# EAGLE board stm32 (EAGLE 8.6.0)
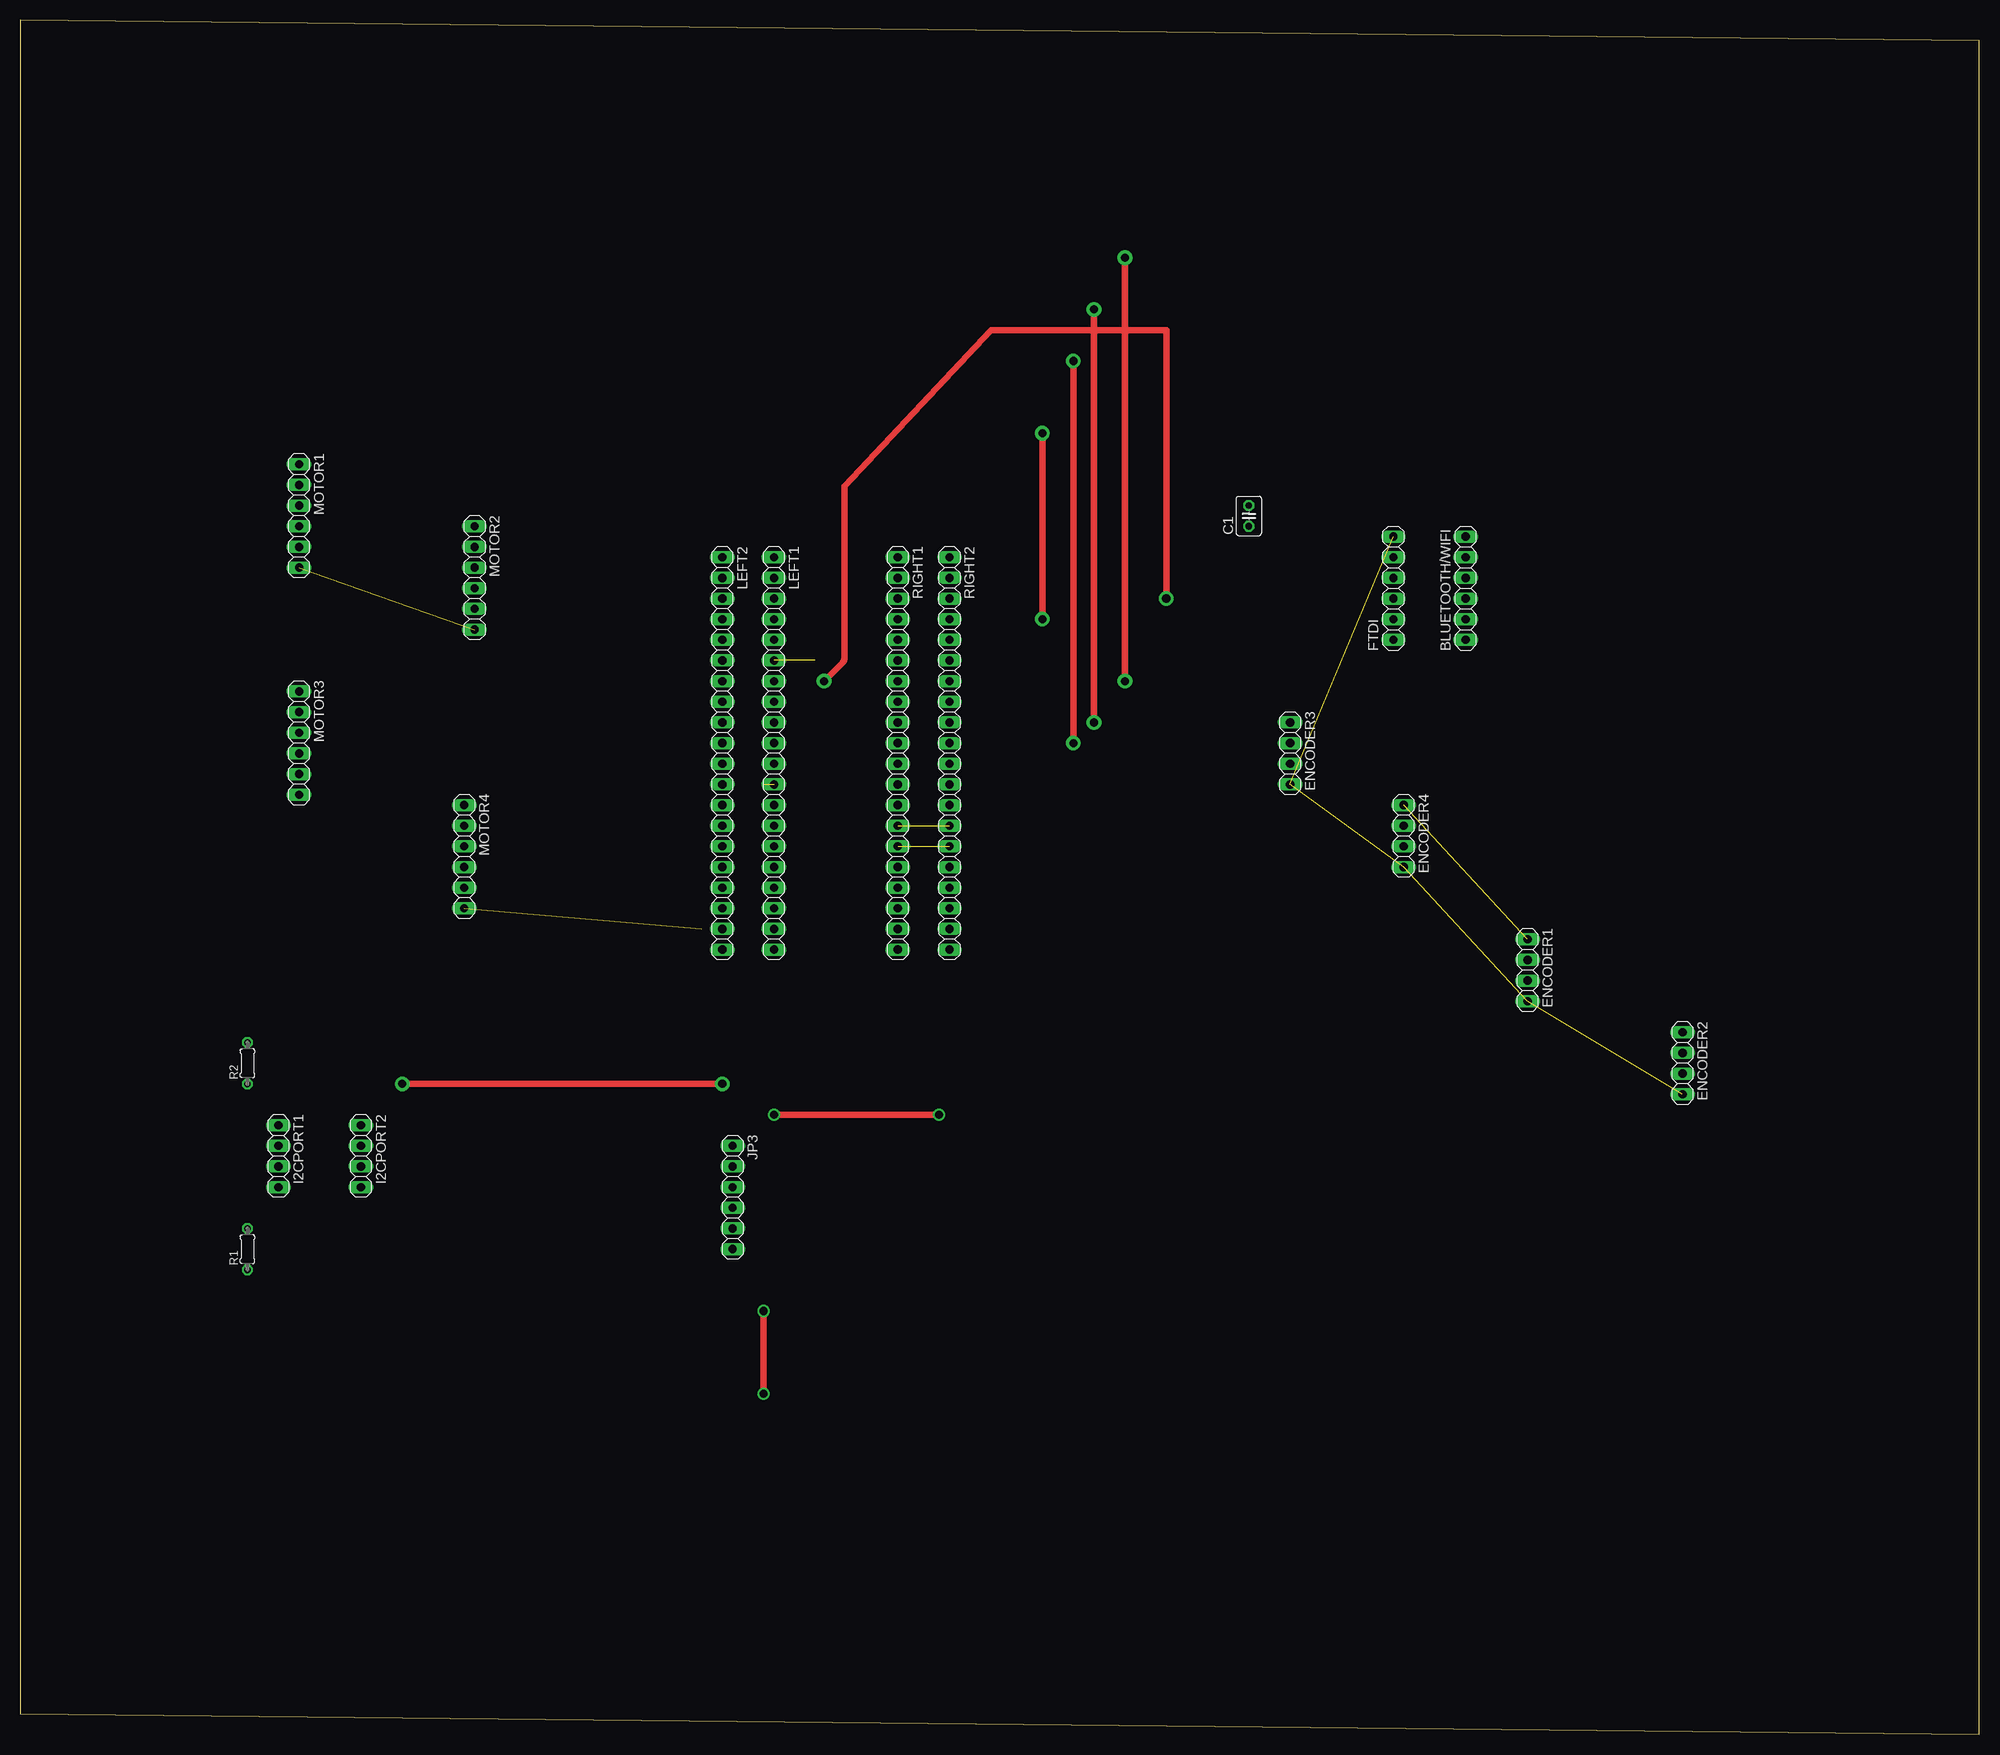
[diagram p0: board, top side]
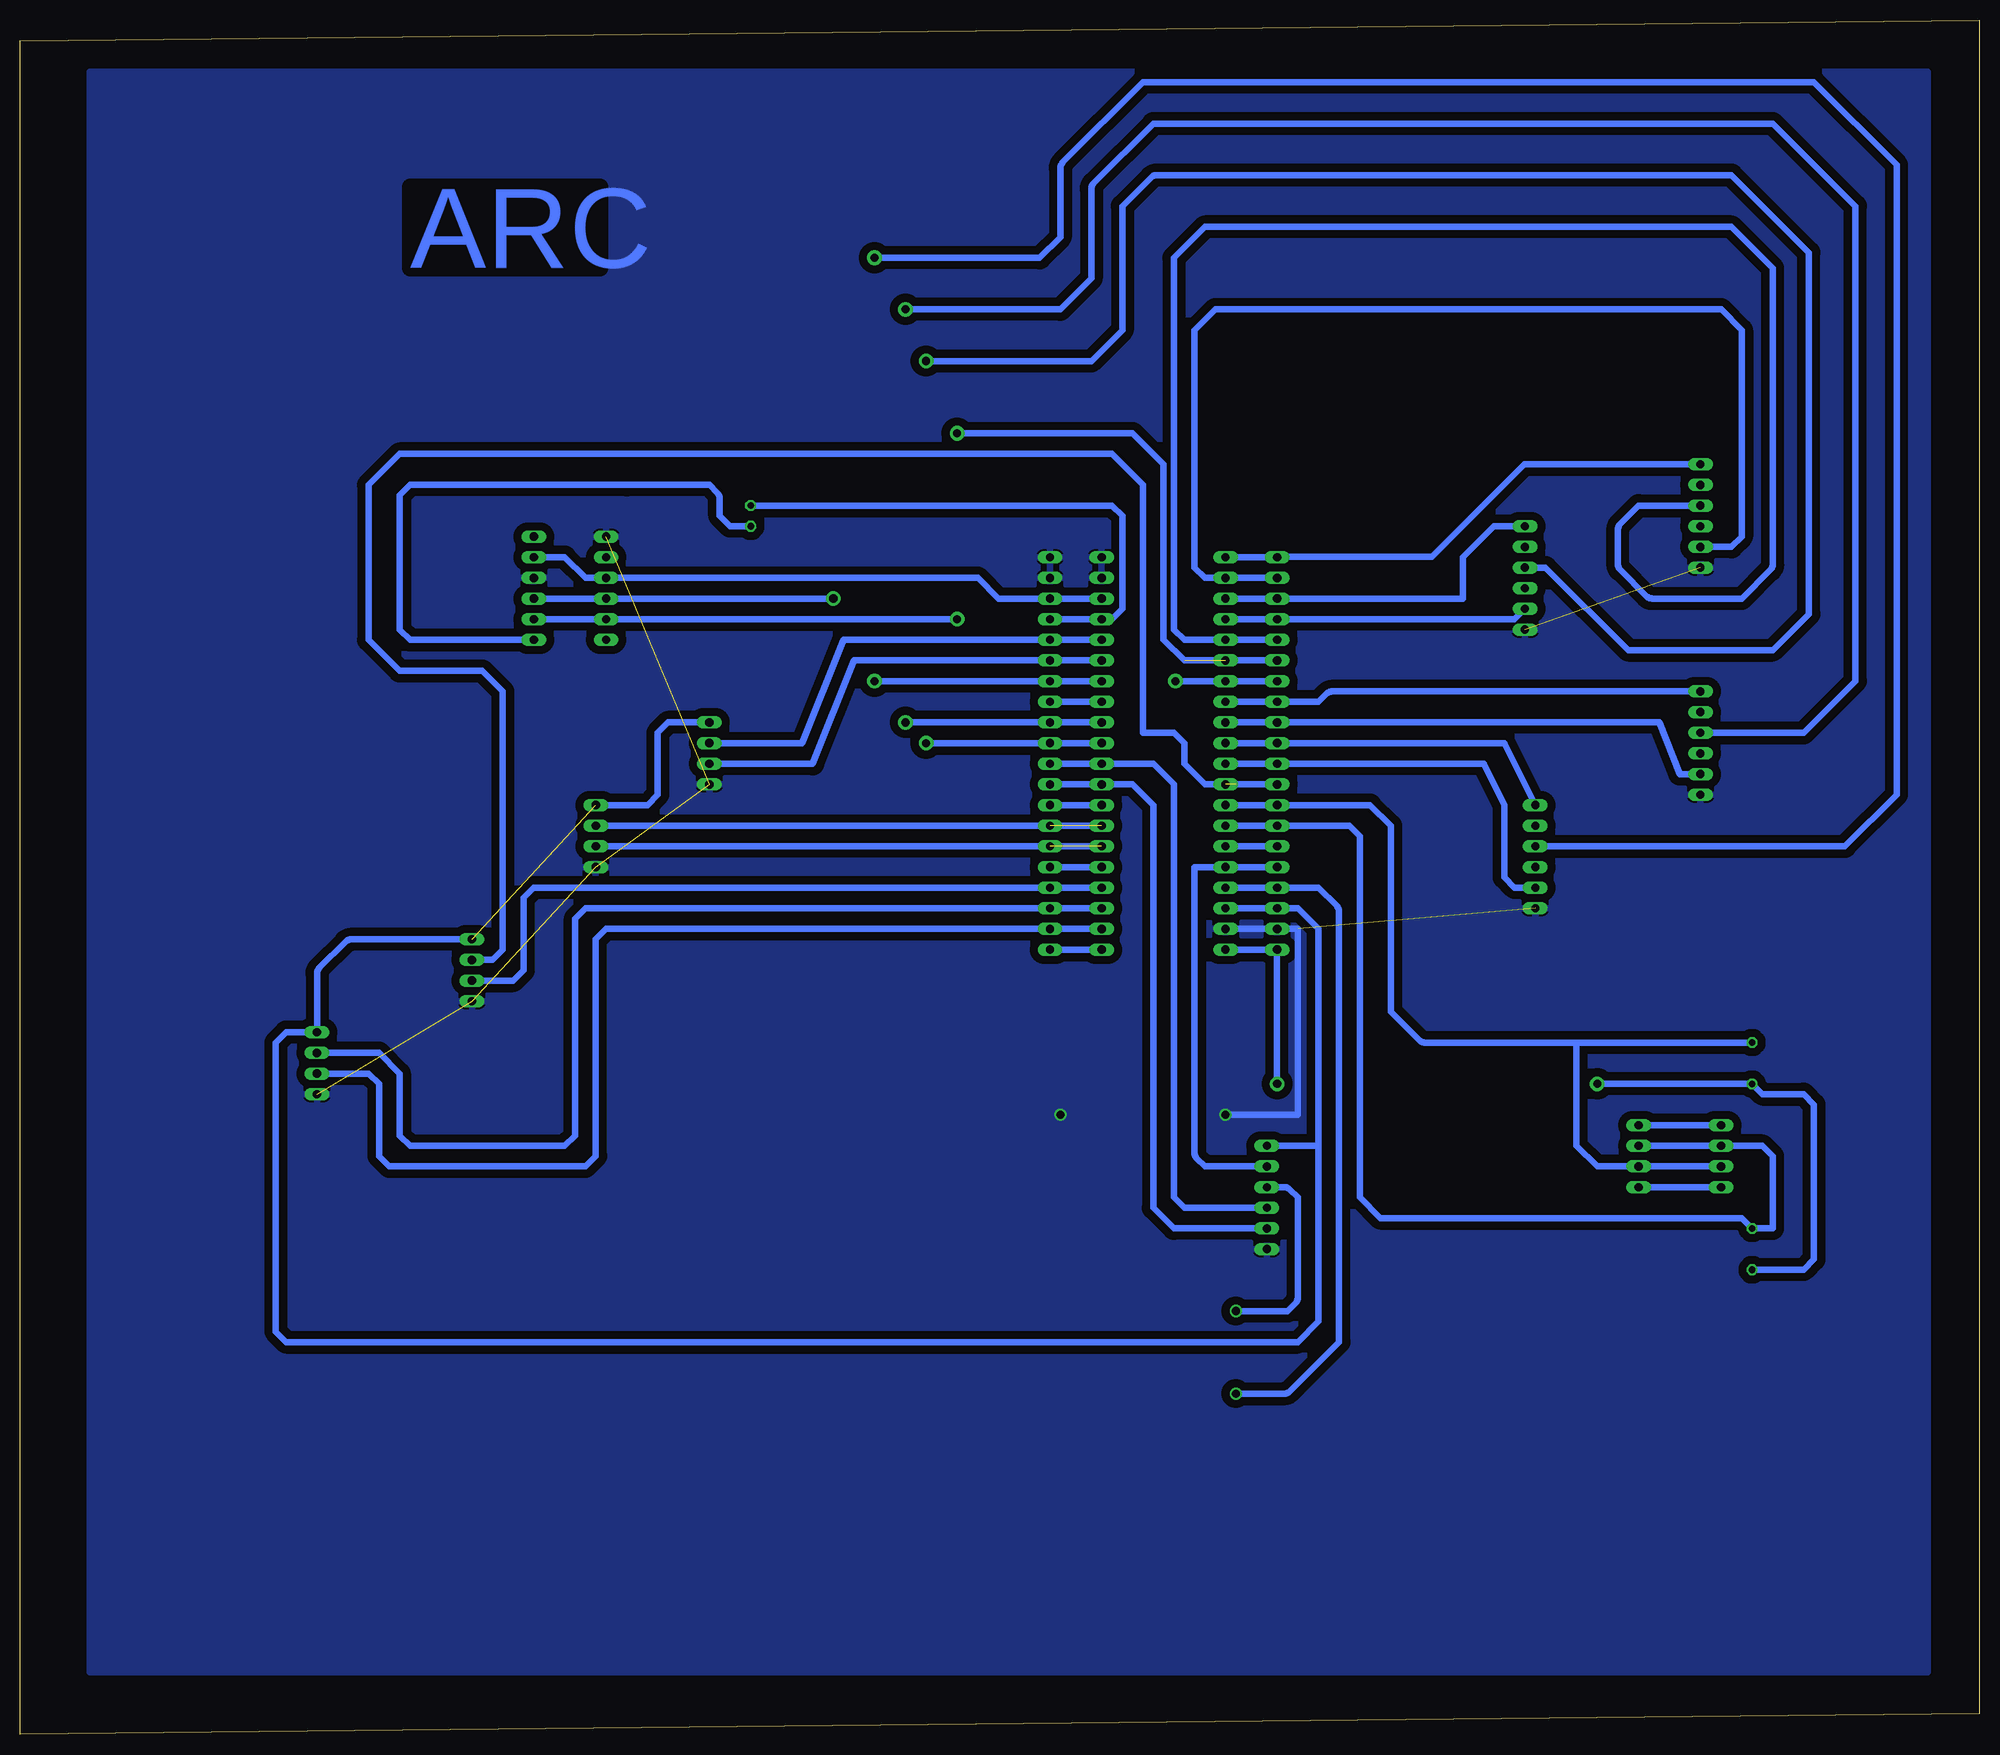
[diagram p1: board, bottom side, seen from below]

Size 240.97 x 210.81 mm. Coordinates in mm from the lower left corner, seen from the top.
Outline: 0,2.54 240.97,0 240.97,208.27 0,210.81 0,2.54
Copper layers (1*16): Top 0.035mm / dielectric 1.5mm / Bottom 0.035mm
Design rules "default": minimum track width 6mil, minimum drill 0.35mm, track to track 6mil, track to pad 6mil, pad to pad 6mil, via to via 6mil, smd to smd 6mil, copper to edge 40mil, drill to drill 6mil, minimum pad ring 10mil, minimum via ring 8mil, stop-mask expansion 4mil, vias tented up to drill 0mil, thermal gap 10mil

## Footprints (pad centres in the part's own frame; a part is rotated, then mirrored left to right if it is on the bottom)
1X06 = drill 1.016 long: 1 -6.35,0; 2 -3.81,0; 3 -1.27,0; 4 1.27,0; 5 3.81,0; 6 6.35,0
C025-030X050 = drill 0.813 octagon: 1 -1.27,0; 2 1.27,0
1X04 = drill 1.016 long: 1 -3.81,0; 2 -1.27,0; 3 1.27,0; 4 3.81,0
1X20 = drill 1.016 long: 1 -24.13,0; 2 -21.59,0; 3 -19.05,0; 4 -16.51,0; 5 -13.97,0; 6 -11.43,0; 7 -8.89,0; 8 -6.35,0; 9 -3.81,0; 10 -1.27,0; 11 1.27,0; 12 3.81,0; 13 6.35,0; 14 8.89,0; 15 11.43,0; 16 13.97,0; 17 16.51,0; 18 19.05,0; 19 21.59,0; 20 24.13,0
0204/5 = drill 0.813 octagon: 1 -2.54,0; 2 2.54,0

## Placement (x,y rotation side)
BLUETOOTH/WIFI  [1X06]  177.8,140.97 90 top
C1  [C025-030X050]  151.13,149.86 90 top
ENCODER1  [1X04]  185.42,93.98 270 top
ENCODER2  [1X04]  204.47,82.55 270 top
ENCODER3  [1X04]  156.21,120.65 270 top
ENCODER4  [1X04]  170.18,110.49 270 top
FTDI  [1X06]  168.91,140.97 90 top
I2CPORT1  [1X04]  31.75,71.12 270 top
I2CPORT2  [1X04]  41.91,71.12 270 top
JP3  [1X06]  87.63,66.04 270 top
LEFT1  [1X20]  92.71,120.65 270 top
LEFT2  [1X20]  86.36,120.65 270 top
MOTOR1  [1X06]  34.29,149.86 270 top
MOTOR2  [1X06]  55.88,142.24 270 top
MOTOR3  [1X06]  34.29,121.92 270 top
MOTOR4  [1X06]  54.61,107.95 270 top
R1  [0204/5]  27.94,59.69 90 top
R2  [0204/5]  27.94,82.55 90 top
RIGHT1  [1X20]  107.95,120.65 270 top
RIGHT2  [1X20]  114.3,120.65 270 top

## Library data of the parts
BLUETOOTH/WIFI ENCODER1-ENCODER4 FTDI I2CPORT1 I2CPORT2 JP3 LEFT1 LEFT2 MOTOR1-MOTOR4 RIGHT1 RIGHT2 = pinhead
C1 R1 R2 = resistor

## Nets
ENCODER4: C1.2 RIGHT1.4 RIGHT2.4
GND: BLUETOOTH/WIFI.4 ENCODER1.4 ENCODER2.4 ENCODER3.4 ENCODER4.4 FTDI.6 JP3.6 LEFT1.19 LEFT2.19 MOTOR1.6 MOTOR2.6 MOTOR3.6 MOTOR4.6 RIGHT1.1 RIGHT1.2 RIGHT2.1 RIGHT2.2
N$1: ENCODER1.1 ENCODER2.1 ENCODER3.1 ENCODER4.1 JP3.1 LEFT1.18 LEFT2.18
N$2: BLUETOOTH/WIFI.1 C1.1
N$3: LEFT1.20 LEFT2.20 R1.1 R2.1
N$4: LEFT1.1 LEFT2.1 MOTOR1.1
N$5: LEFT1.2 LEFT2.2 MOTOR1.5
N$6: LEFT1.3 LEFT2.3 MOTOR2.1
N$7: LEFT1.4 LEFT2.4 MOTOR2.5
N$8: LEFT1.5 LEFT2.5 MOTOR1.3
N$9: MOTOR2.3 RIGHT1.10 RIGHT2.10
N$10: MOTOR3.3 RIGHT1.9 RIGHT2.9
N$11: LEFT1.8 LEFT2.8 MOTOR3.1
N$12: LEFT1.9 LEFT2.9 MOTOR3.5
N$13: LEFT1.10 LEFT2.10 MOTOR4.1
N$14: LEFT1.11 LEFT2.11 MOTOR4.5
N$15: ENCODER2.3 RIGHT1.19 RIGHT2.19
N$16: ENCODER2.2 RIGHT1.18 RIGHT2.18
N$17: ENCODER1.3 RIGHT1.17 RIGHT2.17
N$18: ENCODER4.2 RIGHT1.14 RIGHT2.14
N$19: ENCODER4.3 RIGHT1.15 RIGHT2.15
N$20: RIGHT1.16 RIGHT2.16
N$21: ENCODER1.2 LEFT1.12 LEFT2.12
N$22: RIGHT1.13 RIGHT2.13
N$23: JP3.3 LEFT1.17 LEFT2.17
N$24: JP3.2 LEFT1.16 LEFT2.16
N$25: LEFT1.15 LEFT2.15
N$26: MOTOR4.3 RIGHT1.7 RIGHT2.7
N$27: I2CPORT1.1 I2CPORT2.1
N$28: BLUETOOTH/WIFI.2 FTDI.2 LEFT1.6 LEFT2.6
N$30: I2CPORT1.2 I2CPORT2.2 LEFT1.14 LEFT2.14 R1.2
N$31: BLUETOOTH/WIFI.3 FTDI.3 LEFT1.7 LEFT2.7
N$32: JP3.4 RIGHT1.11 RIGHT2.11
N$33: JP3.5 RIGHT1.12 RIGHT2.12
N$34: I2CPORT1.3 I2CPORT2.3 LEFT1.13 LEFT2.13 R2.2
N$35: BLUETOOTH/WIFI.5 FTDI.4 RIGHT1.3 RIGHT2.3
N$36: RIGHT1.8 RIGHT2.8
N$37: ENCODER3.2 RIGHT1.5 RIGHT2.5
N$38: ENCODER3.3 RIGHT1.6 RIGHT2.6
N$39: RIGHT1.20 RIGHT2.20
N$40: I2CPORT1.4 I2CPORT2.4

## Tracks (layer width: path | path; a pad name or v marks a point on that pad's centre or on a via)
ENCODER4
  Bottom 0.813: RIGHT2.4 RIGHT1.4 106.68,137.16 105.41,138.43 105.41,149.86 106.68,151.13 C1.2
GND  (via drill 1 pad 1.3)  (6 unrouted)
  Top 0.813: v92.71,76.2 v113.03,76.2
  Bottom 0.813: LEFT1.19 LEFT2.19 83.82,99.06 83.82,76.2 v92.71,76.2
  pour Bottom (isolate 1): 6.35,204.47 232.41,204.47 232.41,7.62 6.35,7.62
N$1  (1 unrouted)
  Bottom 0.8: ENCODER4.1 163.83,114.3 162.56,115.57
  Bottom 0.813: LEFT1.18 LEFT2.18 83.82,101.6 81.28,99.06 81.28,72.39 | 81.28,72.39 JP3.1 | 81.28,72.39 81.28,50.8 83.82,48.26 208.28,48.26 209.55,49.53 209.55,85.09 208.28,86.36 ENCODER2.1 204.47,93.57 arc45 204.18,94.27 200.95,97.5 arc45 200.25,97.79 ENCODER1.1 | ENCODER3.1 161.29,124.46 162.56,123.19 162.56,115.57
N$2
  Bottom 0.8: 152.4,148.59 153.67,148.59 154.94,149.86 | 156.21,153.67 166.37,153.67
  Bottom 0.813: C1.1 152.4,148.59 | 166.37,153.67 193.04,153.67 194.31,152.4 194.31,135.89 193.04,134.62 BLUETOOTH/WIFI.1 | 154.94,149.86 154.94,151.99 arc-45 155.23,152.69 156.21,153.67
N$3  (via drill 1 pad 1.8)
  Top 0.813: v46.99,80.01 v86.36,80.01
  Bottom 0.8: R2.1 26.67,78.74 21.59,78.74 20.32,77.47 20.32,58.42 21.59,57.15 R1.1
  Bottom 0.813: LEFT1.20 LEFT2.20 v86.36,80.01 | R2.1 v46.99,80.01
N$4
  Bottom 0.813: LEFT1.1 LEFT2.1 86.41,144.83 67.31,144.83 55.93,156.21 MOTOR1.1
N$5
  Bottom 0.813: LEFT2.2 LEFT1.2 95.25,142.24 96.52,143.51 96.52,172.72 93.98,175.26 31.75,175.26 29.21,172.72 29.21,147.32 30.48,146.05 MOTOR1.5
N$6
  Bottom 0.813: LEFT1.3 LEFT2.3 63.5,139.7 63.5,144.78 59.69,148.59 MOTOR2.1
N$7
  Bottom 0.813: MOTOR2.5 57.15,137.16 LEFT2.4 90.17,137.16 91.44,137.16 LEFT1.4
N$8
  Bottom 0.813: LEFT2.5 LEFT1.5 97.79,134.62 99.06,135.89 99.06,181.61 95.25,185.42 30.48,185.42 25.4,180.34 25.4,143.92 arc45 25.69,143.22 29.21,139.7 40.23,139.7 arc45 40.93,139.99 44.16,143.22 arc45 44.45,143.92 44.45,148.18 arc45 44.16,148.88 41.91,151.13 MOTOR1.3
N$9  (via drill 1 pad 1.8)
  Top 0.813: v129.54,168.91 v129.54,121.92
  Bottom 0.813: MOTOR2.3 53.34,143.51 43.18,133.35 25.4,133.35 20.95,137.8 20.95,182.25 30.48,191.77 101.19,191.77 arc-45 101.89,191.48 105.41,187.96 105.41,172.72 109.22,168.91 v129.54,168.91 | RIGHT1.10 RIGHT2.10 v129.54,121.92
N$10  (via drill 1 pad 1.8)
  Top 0.813: v132.08,175.26 v132.08,124.46
  Bottom 0.813: RIGHT1.9 RIGHT2.9 v132.08,124.46 | MOTOR3.3 21.59,123.19 15.24,129.54 15.24,187.96 25.4,198.12 101.6,198.12 108.93,190.79 arc-45 109.22,190.09 109.22,179.07 113.03,175.26 v132.08,175.26
N$11
  Bottom 0.813: LEFT1.8 LEFT2.8 81.28,127 80.3,127.98 arc45 79.6,128.27 MOTOR3.1
N$12
  Bottom 0.813: MOTOR3.5 36.83,118.11 39.37,124.46 LEFT2.9 LEFT1.9
N$13
  Bottom 0.813: MOTOR4.1 58.42,121.92 LEFT2.10 LEFT1.10
N$14
  Bottom 0.813: LEFT1.11 LEFT2.11 60.96,119.38 58.42,114.3 58.42,105.41 57.15,104.14 MOTOR4.5
N$15
  Bottom 0.813: RIGHT1.19 RIGHT2.19 168.91,99.06 170.18,97.79 170.18,71.12 171.45,69.85 195.58,69.85 196.85,71.12 196.85,80.01 198.12,81.28 ENCODER2.3
N$16
  Bottom 0.813: RIGHT1.18 RIGHT2.18 171.45,101.6 172.72,100.33 172.72,73.66 173.99,72.39 193.04,72.39 194.31,73.66 194.31,81.28 196.85,83.82 ENCODER2.2
N$17
  Bottom 0.813: RIGHT1.17 RIGHT2.17 177.8,104.14 179.07,102.87 179.07,93.98 180.34,92.71 ENCODER1.3
N$18  (1 unrouted)
  Bottom 0.813: ENCODER4.2 RIGHT1.14
N$19  (1 unrouted)
  Bottom 0.813: RIGHT1.15 ENCODER4.3
N$20
  Bottom 0.813: RIGHT1.16 RIGHT2.16
N$21  (1 unrouted)
  Bottom 0.813: LEFT2.12 91.44,116.84 | ENCODER1.2 182.88,95.25 181.61,96.52 181.61,128.27 184.15,130.81 194.31,130.81 198.12,134.62 198.12,153.67 194.31,157.48 106.68,157.48 102.87,153.67 102.87,123.19 99.06,123.19 97.79,121.92 97.79,119.38 95.25,116.84 LEFT1.12
N$22
  Bottom 0.813: RIGHT2.13 RIGHT1.13
N$23  (via drill 1 pad 1.3)
  Top 0.813: v91.44,52.07 v91.44,41.91
  Bottom 0.813: LEFT1.17 LEFT2.17 81.28,104.14 79.03,101.89 arc45 78.74,101.19 78.74,48.26 84.8,42.2 arc45 85.5,41.91 v91.44,41.91 | JP3.3 85.5,67.31 arc45 84.8,67.02 83.82,66.04 83.82,53.75 arc45 84.11,53.05 85.09,52.07 v91.44,52.07
N$24
  Bottom 0.813: LEFT2.16 LEFT1.16 96.52,106.68 96.52,71.53 arc-45 96.23,70.83 95.25,69.85 JP3.2
N$25
  Bottom 0.813: LEFT2.15 LEFT1.15
N$26  (via drill 1 pad 1.8)
  Top 0.813: v135.89,181.61 v135.89,129.54
  Bottom 0.813: RIGHT1.7 RIGHT2.7 v135.89,129.54 | MOTOR4.3 16.51,109.22 10.16,115.57 10.16,193.04 20.32,203.2 102.87,203.2 112.74,193.33 arc-45 113.03,192.63 113.03,184.15 115.57,181.61 v135.89,181.61
N$27
  Bottom 0.8: I2CPORT1.1 I2CPORT2.1
N$28  (via drill 1 pad 1.8)  (1 unrouted)
  Top 0.813: v125.73,137.16 v125.73,160.02
  Bottom 0.813: BLUETOOTH/WIFI.2 FTDI.2 v125.73,137.16 | v125.73,160.02 104.14,160.02 100.33,156.21 100.33,134.62 97.79,132.08 LEFT2.6
N$30
  Bottom 0.8: 76.2,110.49 76.2,66.04 73.66,63.5 29.21,63.5 R1.2 25.4,62.23 25.4,71.12 26.67,72.39 I2CPORT1.2 I2CPORT2.2
  Bottom 0.813: LEFT1.14 LEFT2.14 77.47,111.76 76.2,110.49
N$31  (via drill 1 pad 1.8)
  Top 0.813: v140.97,139.7 140.97,172.72 119.38,172.72 101.41,153.48 101.41,132.49 arc-45 101.12,131.79 v98.87,129.54
  Bottom 0.813: LEFT2.7 LEFT1.7 v98.87,129.54 | BLUETOOTH/WIFI.3 FTDI.3 v140.97,139.7
N$32
  Bottom 0.813: RIGHT2.11 RIGHT1.11 101.6,119.38 99.06,116.84 99.06,66.04 97.79,64.77 JP3.4
N$33
  Bottom 0.8: JP3.5 99.06,62.23 101.6,64.77
  Bottom 0.813: RIGHT2.12 RIGHT1.12 104.14,116.84 101.6,114.3 101.6,64.77
N$34
  Bottom 0.8: I2CPORT1.3 I2CPORT2.3 46.99,69.85 49.53,72.39 49.53,85.09
  Bottom 0.813: LEFT1.13 LEFT2.13 74.93,114.3 72.39,111.76 72.39,88.9 68.87,85.38 arc-45 68.17,85.09 49.53,85.09 R2.2
N$35
  Bottom 0.813: RIGHT1.3 RIGHT2.3 120.65,139.7 123.19,142.24 FTDI.4 171.45,142.24 173.99,144.78 BLUETOOTH/WIFI.5
N$36
  Bottom 0.813: RIGHT1.8 RIGHT2.8
N$37
  Bottom 0.813: RIGHT1.5 RIGHT2.5 139.7,134.62 144.78,121.92 ENCODER3.2
N$38
  Bottom 0.813: RIGHT1.6 RIGHT2.6 138.43,132.08 143.51,119.38 ENCODER3.3
N$39
  Bottom 0.813: RIGHT2.20 RIGHT1.20
N$40
  Bottom 0.8: I2CPORT2.4 I2CPORT1.4

## Text on the board
Bottom: ARC